# EAGLE board Tracker_Fixture_v5 (EAGLE 9.6.2)
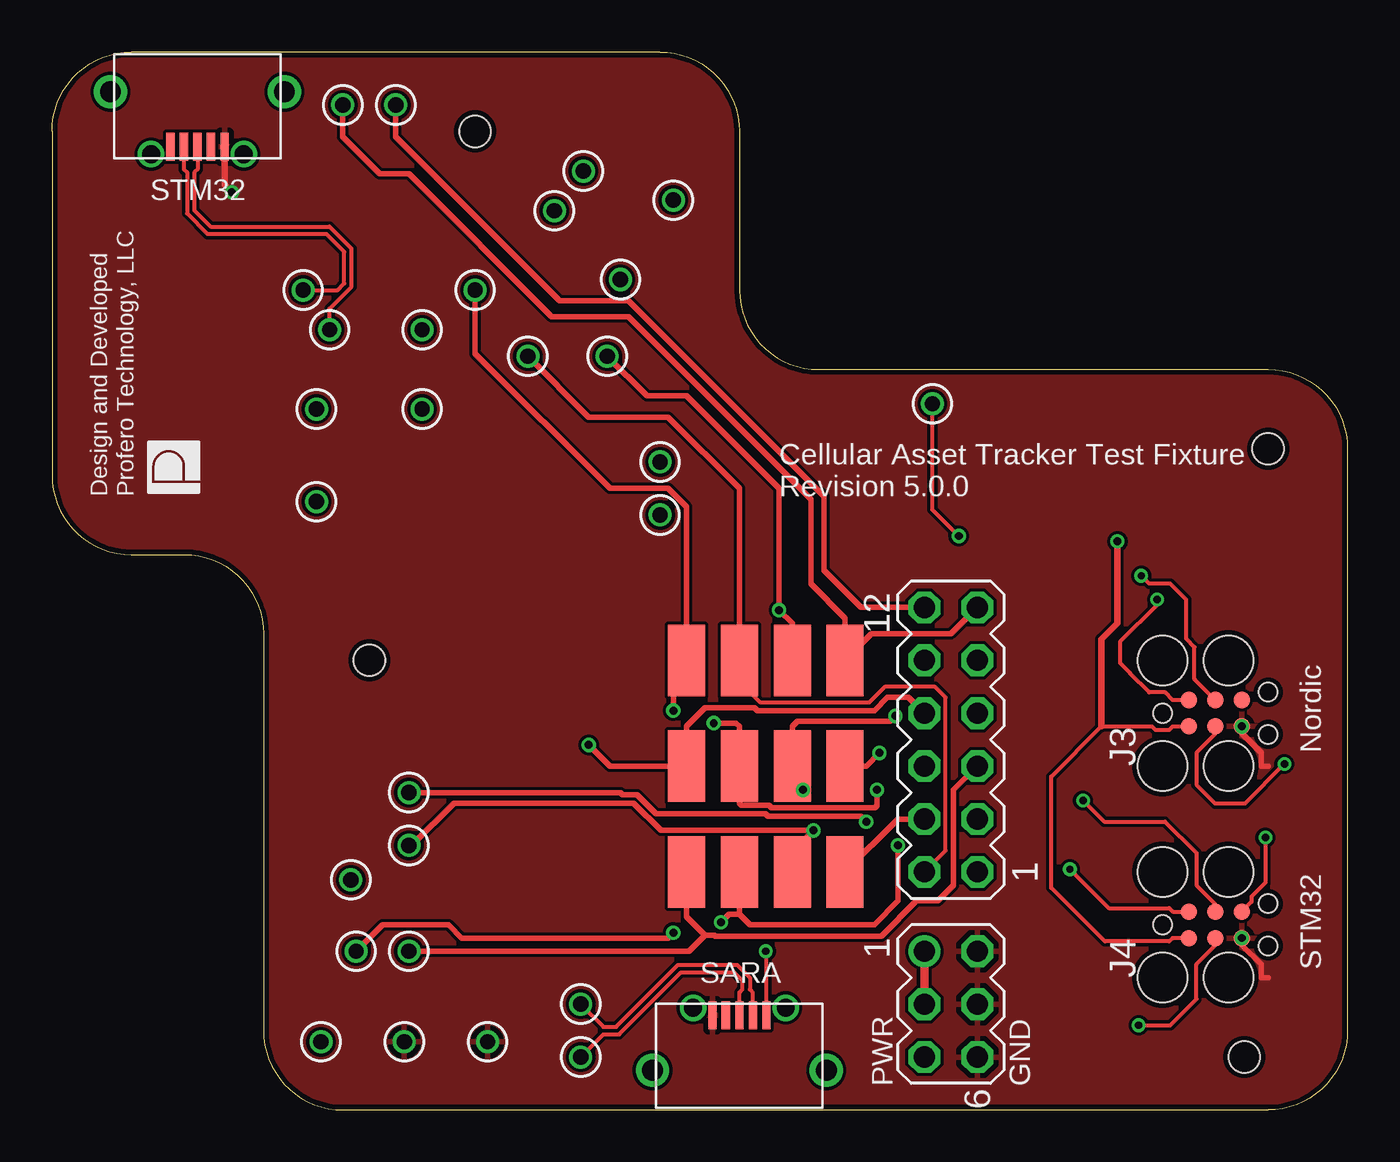
[diagram p0: board, top side]
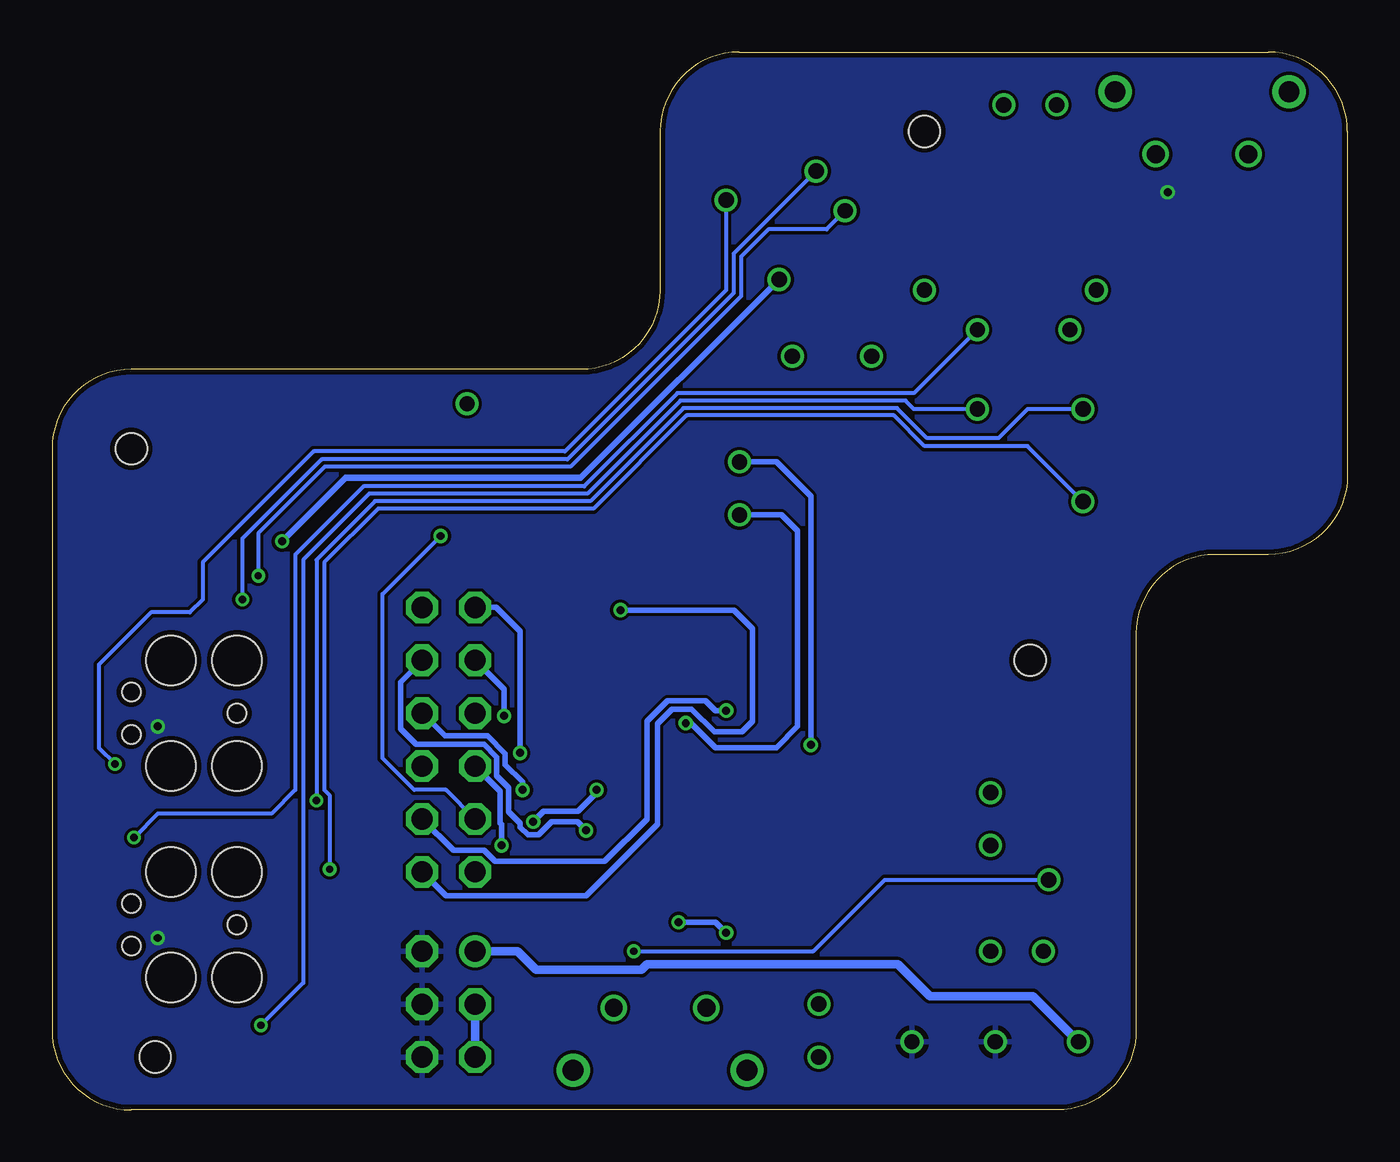
[diagram p1: board, bottom side, seen from below]

Size 62.23 x 50.8 mm. Coordinates in mm from the lower left corner, seen from the top.
Outline: 13.97,0 58.42,0 arc90 62.23,3.81 62.23,31.75 arc90 58.42,35.56 36.83,35.56 arc-90 33.02,39.37 33.02,46.99 arc90 29.21,50.8 3.81,50.8 arc90 0,46.99 0,30.48 arc90 3.81,26.67 6.35,26.67 arc-90 10.16,22.86 10.16,3.81 arc90 13.97,0
Copper layers (1*16): Top 0.035mm / dielectric 1.5mm / Bottom 0.035mm
Design rules "default *": minimum track width 6mil, minimum drill 0.35mm, track to track 6mil, track to pad 6mil, pad to pad 6mil, via to via 6mil, smd to smd 6mil, copper to edge 10mil, drill to drill 6mil, minimum pad ring 4mil, minimum via ring 6mil, stop-mask expansion 4mil, vias tented up to drill 16mil, thermal gap 10mil
Net classes: 1 usb_diff: width 0.203 mm, clearance 0.152 mm; 2 sara_diff: width 0.203 mm, clearance 0.152 mm
Holes 1.5 mm at 20.32,46.99 58.42,31.75 57.28,2.54 15.24,21.59

## Footprints (pad centres in the part's own frame; a part is rotated, then mirrored left to right if it is on the bottom)
MOLEX_USB_047590 = smd 0.39 x 1.35: 1 1.3,2.65; 5 -1.3,2.65 | smd 0.4 x 1.35: 2 0.65,2.65; 3 0,2.65; 4 -0.65,2.65 | drill 0.85 pad 1.15: 6 -2.225,3; 7 2.225,3 | drill 1 pad 1.6: 8 -4.175,0; 9 4.175,0
TC2030-MCP = smd 0.787 x 0.787: 1 1.27,-0.635; 2 1.27,0.635; 3 2.54,-0.635; 4 2.54,0.635; 5 3.81,-0.635; 6 3.81,0.635 | hole 0.889: 0,0; 5.08,-1.016; 5.08,1.016 | hole 2.375: 0,2.54; 0,-2.54; 3.175,-2.54; 3.175,2.54
MA06-2 = drill 1.016 octagon: 1 -6.35,-1.27; 2 -6.35,1.27; 3 -3.81,-1.27; 4 -3.81,1.27; 5 -1.27,-1.27; 6 -1.27,1.27; 7 1.27,-1.27; 8 1.27,1.27; 9 3.81,-1.27; 10 3.81,1.27; 11 6.35,-1.27; 12 6.35,1.27
MA03-2 = drill 1.016: 1 -2.54,-1.27 | drill 1.016 octagon: 2 -2.54,1.27; 3 0,-1.27; 4 0,1.27; 5 2.54,-1.27; 6 2.54,1.27
MILLMAX-0914-X = drill 0.737: 1 0,0
KEYSTONE-5017 = smd 3.429 x 1.778: P$1 0,0

## Placement (x,y rotation side)
J1  MICRO_USB047590  [MOLEX_USB_047590]  6.98,48.9 180 top
J2  MICRO_USB047590  [MOLEX_USB_047590]  33.02,1.91 0 top
J3  [TC2030-MCP]  53.34,19.05 0 top
J4  [TC2030-MCP]  53.34,8.89 0 top
SV1  [MA06-2]  43.18,17.78 90 top
SV2  [MA03-2]  43.18,5.08 270 top
TP1  0914-X-15-20-77-14-11-0  [MILLMAX-0914-X]  12.92,3.27 0 top
TP2  0914-X-15-20-77-14-11-0  [MILLMAX-0914-X]  16.92,3.27 0 top
TP3  0914-X-15-20-77-14-11-0  [MILLMAX-0914-X]  20.92,3.27 0 top
TP4  0914-X-15-20-77-14-11-0  [MILLMAX-0914-X]  25.4,2.54 0 top
TP5  0914-X-15-20-77-14-11-0  [MILLMAX-0914-X]  25.4,5.08 0 top
TP6  0914-X-15-20-77-14-11-0  [MILLMAX-0914-X]  14.6,7.62 0 top
TP7  0914-X-15-20-77-14-11-0  [MILLMAX-0914-X]  17.15,7.62 0 top
TP8  0914-X-15-20-77-14-11-0  [MILLMAX-0914-X]  17.15,15.24 0 top
TP9  0914-X-15-20-77-14-11-0  [MILLMAX-0914-X]  17.15,12.7 0 top
TP10  0914-X-15-20-77-14-11-0  [MILLMAX-0914-X]  12.06,39.37 0 top
TP11  0914-X-15-20-77-14-11-0  [MILLMAX-0914-X]  13.33,37.47 0 top
TP12  0914-X-15-20-77-14-11-0  [MILLMAX-0914-X]  12.7,33.66 0 top
TP13  0914-X-15-20-77-14-11-0  [MILLMAX-0914-X]  17.78,33.66 0 top
TP14  0914-X-15-20-77-14-11-0  [MILLMAX-0914-X]  12.7,29.21 0 top
TP15  0914-X-15-20-77-14-11-0  [MILLMAX-0914-X]  17.78,37.47 0 top
TP16  0914-X-15-20-77-14-11-0  [MILLMAX-0914-X]  20.32,39.37 0 top
TP17  0914-X-15-20-77-14-11-0  [MILLMAX-0914-X]  22.86,36.2 0 top
TP18  0914-X-15-20-77-14-11-0  [MILLMAX-0914-X]  26.67,36.2 0 top
TP19  0914-X-15-20-77-14-11-0  [MILLMAX-0914-X]  24.13,43.18 0 top
TP20  0914-X-15-20-77-14-11-0  [MILLMAX-0914-X]  25.53,45.09 0 top
TP21  0914-X-15-20-77-14-11-0  [MILLMAX-0914-X]  29.84,43.69 0 top
TP22  0914-X-15-20-77-14-11-0  [MILLMAX-0914-X]  13.97,48.26 0 top
TP23  0914-X-15-20-77-14-11-0  [MILLMAX-0914-X]  16.51,48.26 0 top
TP24  0914-X-15-20-77-14-11-0  [MILLMAX-0914-X]  29.21,31.11 0 top
TP25  0914-X-15-20-77-14-11-0  [MILLMAX-0914-X]  29.21,28.57 0 top
TP26  0914-X-15-20-77-14-11-0  [MILLMAX-0914-X]  42.29,33.91 0 top
TP27  5017  [KEYSTONE-5017]  38.1,21.59 90 top
TP28  5017  [KEYSTONE-5017]  38.1,16.51 270 top
TP29  5017  [KEYSTONE-5017]  30.48,21.59 90 top
TP30  5017  [KEYSTONE-5017]  33.02,21.59 90 top
TP31  5017  [KEYSTONE-5017]  35.56,21.59 90 top
TP32  5017  [KEYSTONE-5017]  30.48,16.51 90 top
TP33  5017  [KEYSTONE-5017]  33.02,16.51 90 top
TP34  5017  [KEYSTONE-5017]  33.02,11.43 90 top
TP35  5017  [KEYSTONE-5017]  30.48,11.43 90 top
TP36  5017  [KEYSTONE-5017]  38.1,11.43 270 top
TP37  5017  [KEYSTONE-5017]  35.56,16.51 90 top
TP38  5017  [KEYSTONE-5017]  35.56,11.43 90 top
TP39  0914-X-15-20-77-14-11-0  [MILLMAX-0914-X]  14.35,11.05 0 top
TP40  0914-X-15-20-77-14-11-0  [MILLMAX-0914-X]  27.3,39.88 0 top
U$1  [PROFERO-LOGO-SMALL]  7.11,29.59 90 top

## Library data of the parts
J1 J2 = ASSIST; DIGI#: WM17144CT-ND; MANF: Molex, LLC; MANF#: 0475900001; URL: https://www.digikey.com/product-detail/en/molex-llc/0475900001/WM17144CT-ND/1832256
J3 J4 = Tag-Connect-Footprints
SV1 SV2 = con-lstb; OC_FARNELL: unknown; OC_NEWARK: unknown
TP1-TP40 = Profero-Pads
U$1 = Profero-Templates

## Nets
EINK_CS: SV1.3 TP16.1 TP29.P$1
EINK_MOSI: SV1.1 TP18.1 TP31.P$1
EINK_SCK: SV1.2 TP17.1 TP30.P$1
GND: J1.5 J2.5 J3.5 J4.5 SV2.2 SV2.4 SV2.6 TP2.1 TP3.1
GPS_RX: SV1.7 TP25.1 TP33.P$1
GPS_SCL: SV1.5 TP7.1 TP35.P$1
GPS_SDA: SV1.6 TP6.1 TP34.P$1
GPS_TX: SV1.8 TP24.1 TP32.P$1
ISP_RESET: J3.3 TP21.1
ISP_SWCLK: J3.4 TP19.1
ISP_SWDIO: J3.2 TP20.1
PACK+: SV2.1 SV2.3 SV2.5 TP1.1
SARA_D_N [sara_diff]: J2.2 TP5.1
SARA_D_P [sara_diff]: J2.3 TP4.1
SARA_RX: SV1.9 TP9.1 TP38.P$1
SARA_TX: SV1.10 TP8.1 TP37.P$1
SARA_USB_DET: J2.1 TP39.1
SCL: SV1.11 TP22.1 TP27.P$1
SDA: SV1.12 TP23.1 TP28.P$1
ST_RESET: J4.3 TP13.1
ST_SWCLK: J4.4 TP12.1
ST_SWDIO: J4.2 TP14.1
ST_SWO: J4.6 TP15.1
TIMEPULSE: SV1.4 TP26.1 TP36.P$1
USB_D_N [usb_diff]: J1.2 TP10.1
USB_D_P [usb_diff]: J1.3 TP11.1
VDDIO: J3.1 J4.1 TP40.1

## Tracks (layer width: path | path; a pad name or v marks a point on that pad's centre or on a via)
EINK_CS  (via drill 0.38)
  Top 0.254: v29.84,19.18 29.84,20.95 TP29.P$1 30.48,28.96 29.59,29.84 26.8,29.84 20.32,36.32 TP16.1
  Bottom 0.254: SV1.3 42.95,12.47 41.48,12.47 40.95,11.94 35.69,11.94 33.66,13.97 33.66,18.67 32.67,19.66 30.83,19.66 30.35,19.18 v29.84,19.18
EINK_MOSI  (via drill 0.38)
  Top 0.254: TP31.P$1 35.56,23.37 v34.93,24 34.93,29.84 30.48,34.29 28.58,34.29 TP18.1
  Bottom 0.254: SV1.1 43.31,10.29 36.58,10.29 33.15,13.72 33.15,18.55 32.45,19.25 31.51,19.25 30.42,18.16 29.08,18.16 28.58,18.67 28.58,23.11 29.46,24 v34.93,24
EINK_SCK
  Top 0.203: SV1.2 42.93,12.45 42.93,19.81 42.42,20.32 40.01,20.32 39.24,19.56 34.04,19.56 33.27,20.32 33.27,21.97 33.02,21.72
  Top 0.254: TP17.1 25.78,33.27 29.59,33.27 33.02,29.84 33.02,21.72 TP30.P$1
GND  (via drill 0.38)
  Top 0.254: J4.5 57.15,7.92 57.16,7.92 58.08,7 58.08,6.35 58.42,6.35 | J3.5 57.15,18.08 57.16,18.08 58.08,17.16 58.08,16.51 58.42,16.51
  Top 0.305: J1.5 8.29,44.42 v8.64,44.07
  other vias: 57.15,18.41 57.15,8.26
  pour Top: -7.62,52.07 66.04,52.07 66.04,-1.27 -7.62,-1.27
  pour Bottom: -10.16,52.07 66.04,52.07 66.04,-1.27 -10.16,-1.27
GPS_RX  (via drill 0.38)
  Top 0.254: v39.62,15.37 39.62,14.61 39.54,14.52 34.55,14.52 34.44,14.63 33.12,14.63 33.02,14.73 TP33.P$1 33.02,18.41 32.86,18.58 v31.79,18.58
  Bottom 0.254: v39.62,15.37 39.62,15.75 40.46,16.59 40.46,17.11 41.31,17.96 43.36,17.96 SV1.7 | TP25.1 27.18,28.57 26.42,27.81 26.42,18.41 27.43,17.4 30.35,17.4 31.53,18.58 v31.79,18.58
GPS_SCL
  Top 0.254: TP35.P$1 30.48,9.27 31.37,8.38 | TP7.1 30.61,7.62 31.37,8.38 | 31.37,8.38 31.81,8.38 31.85,8.34 39.84,8.34 41.53,10.03 42.55,10.03 43.31,10.79 43.31,15.37 SV1.5
GPS_SDA  (via drill 0.38)
  Top 0.254: TP34.P$1 33.02,9.4 | 33.02,9.4 33.53,8.89 39.5,8.89 40.64,10.03 v40.64,12.7 | TP6.1 15.87,8.89 19.05,8.89 19.69,8.26 29.59,8.26 v29.84,8.51 | v32.13,9.02 32.51,9.4 33.02,9.4
  Bottom 0.254: v40.64,12.7 40.64,13.71 40.7,13.78 40.7,15.3 SV1.6 | v29.84,8.51 30.35,9.02 v32.13,9.02
GPS_TX  (via drill 0.38)
  Top 0.254: SV1.8 41.15,19.81 40.13,19.81 39.5,19.18 33.88,19.18 33.75,19.3 31.37,19.3 30.48,18.41 TP32.P$1 26.8,16.51 v25.78,17.53
  Bottom 0.254: v25.78,17.53 25.78,29.46 27.43,31.11 TP24.1
ISP_RESET  (via drill 0.35)
  Top 0.203: J3.3 55.88,18.06 54.97,17.15 54.97,15.62 55.88,14.71 57.31,14.71 v59.21,16.61
  Bottom 0.203: TP21.1 29.84,39.37 37.59,31.62 49.66,31.62 54.99,26.29 54.99,24.51 55.61,23.89 57.47,23.89 59.98,21.38 59.98,17.39 v59.21,16.61
ISP_SWCLK  (via drill 0.35)
  Top 0.203: J3.4 54.88,20.68 54.88,22.23 54.48,22.63 54.48,24.51 53.72,25.27 52.7,25.27 v52.32,25.65
  Bottom 0.203: TP19.1 25.02,42.29 27.82,42.29 29.13,40.98 29.13,39.08 37.32,30.89 49.13,30.89 52.32,27.69 v52.32,25.65
ISP_SWDIO  (via drill 0.35)
  Top 0.203: J3.2 53.84,19.68 53.48,20.05 52.7,20.05 51.8,20.95 51.8,20.97 51.31,21.46 51.31,22.48 53.09,24.26 v53.09,24.51
  Bottom 0.203: TP20.1 29.49,41.12 29.49,39.22 37.47,31.24 49.28,31.24 53.09,27.43 v53.09,24.51
PACK+
  Top 0.406: SV2.3 SV2.1
  Bottom 0.406: TP1.1 15.11,5.46 20.07,5.46 21.59,6.98 33.66,6.98 33.91,6.73 38.99,6.73 39.88,7.62 SV2.1 | SV2.3 SV2.5
SARA_D_N
  Top 0.203: TP5.1 26.49,3.99 27.1,3.99 30.07,6.96 32.91,6.96 33.52,6.35 33.52,5.78 33.67,5.64 J2.2
SARA_D_P
  Top 0.203: TP4.1 26.49,3.63 27.25,3.63 30.22,6.6 32.77,6.6 33.17,6.2 33.17,6.1 33.17,5.97 33.17,5.78 33.02,5.64 J2.3
SARA_RX  (via drill 0.38)
  Top 0.254: TP38.P$1 35.56,12.41 v36.58,13.42 29.25,13.42 27.94,14.73 19.3,14.73 17.27,12.7 TP9.1
  Bottom 0.254: v36.58,13.42 37,13.84 38.24,13.84 38.86,13.22 39.37,13.22 39.74,13.58 39.74,13.77 40.3,14.33 40.3,15.47 40.87,16.04 40.87,16.94 41.48,17.55 44.73,17.55 45.49,18.31 45.49,20.55 SV1.9
SARA_TX  (via drill 0.38)
  Top 0.254: v40.51,18.92 40.26,18.67 35.81,18.67 35.56,18.41 35.56,16.76 TP37.P$1 35.56,15.88 v36.07,15.37 | TP8.1 27.3,15.24 27.41,15.14 28.11,15.14 29.02,14.22 34.27,14.22 34.39,14.11 38.85,14.11 v39.12,13.84
  Bottom 0.254: v40.51,18.92 40.51,20.19 SV1.10 | v39.12,13.84 38.61,14.35 36.96,14.35 36.07,15.24 v36.07,15.37
SARA_USB_DET  (via drill 0.35)
  Top 0.203: J2.1 34.32,7.59 v34.29,7.62
  Bottom 0.203: v34.29,7.62 25.65,7.62 22.23,11.05 TP39.1
SCL
  Top 0.254: SV1.11 43.18,22.86 39.37,22.86 TP27.P$1 38.1,23.62 36.45,25.27 36.45,29.34 27.69,38.1 24,38.1 17.15,44.96 15.75,44.96 13.97,46.74 TP22.1
SDA  (via drill 0.38)
  Top 0.254: TP28.P$1 39.12,16.51 v39.75,17.14 | TP23.1 16.51,46.74 24.38,38.86 27.69,38.86 37.08,29.46 37.08,25.91 38.86,24.13 SV1.12
  Bottom 0.254: v39.75,17.14 39.75,22.99 40.89,24.13 SV1.12
ST_RESET  (via drill 0.35)
  Top 0.203: v52.2,4.06 53.72,4.06 54.97,5.31 54.97,6.99 55.88,7.9 J4.3
  Bottom 0.203: TP13.1 20.83,33.66 21.23,34.06 32.04,34.06 36.51,29.59 46.99,29.59 50.16,26.42 50.16,6.1 v52.2,4.06
ST_SWCLK  (via drill 0.35)
  Top 0.203: v49.53,14.86 50.55,13.84 53.47,13.84 54.97,12.34 54.97,10.79 55.88,9.88 J4.4
  Bottom 0.203: TP12.1 15.37,33.66 16.76,32.26 20.19,32.26 21.64,33.71 31.9,33.71 36.37,29.23 46.71,29.23 49.53,26.42 v49.53,14.86
ST_SWDIO  (via drill 0.35)
  Top 0.203: J4.2 53.84,9.53 53.67,9.69 50.76,9.69 v48.9,11.56
  Bottom 0.203: TP14.1 15.37,31.88 20.32,31.88 21.79,33.35 31.75,33.35 36.22,28.88 46.56,28.88 49.15,26.29 49.15,15.37 48.9,15.12 v48.9,11.56
ST_SWO  (via drill 0.35)
  Top 0.203: J4.6 57.62,9.99 57.62,10.24 58.29,10.91 v58.29,13.08
  Bottom 0.203: TP15.1 20.83,34.42 32.19,34.42 36.66,29.95 47.27,29.95 50.55,26.67 50.55,15.37 51.69,14.22 57.15,14.22 v58.29,13.08
TIMEPULSE  (via drill 0.38)
  Top 0.203: v43.56,27.56 42.29,28.83 TP26.1
  Top 0.254: TP36.P$1 40.64,13.97 SV1.4
  Bottom 0.203: SV1.4 43.31,15.37 44.83,15.37 46.36,16.89 46.36,24.77 v43.56,27.56
USB_D_N
  Top 0.203: TP10.1 13.72,39.37 14.03,39.69 14.03,41.21 13.18,42.06 7.47,42.06 6.48,43.05 6.48,45.02 6.33,45.16 J1.2
USB_D_P
  Top 0.203: TP11.1 13.33,38.48 14.39,39.54 14.39,41.36 13.33,42.42 7.62,42.42 6.84,43.2 6.84,45.02 6.98,45.16 J1.3
VDDIO  (via drill 0.38)
  Top 0.203: J4.1 53.84,8.26 53.67,8.09 50.58,8.09 48.01,10.67 48.01,16 50.42,18.41 52.84,18.41 53.01,18.25 53.67,18.25 53.84,18.41 J3.1
  Top 0.305: v51.18,27.3 51.18,23.37 50.42,22.61 50.42,18.41
  Bottom 0.305: TP40.1 36.83,30.35 48.13,30.35 v51.18,27.3

## Text on the board
tPlace: STM32 | Cellular Asset Tracker Test Fixture | Design and Developed | Profero Technology, LLC | Revision 5.0.0 | Nordic | SARA | STM32 | PWR | GND